# EAGLE board AliBerkErogluEagleAssignment (EAGLE 9.5.1)
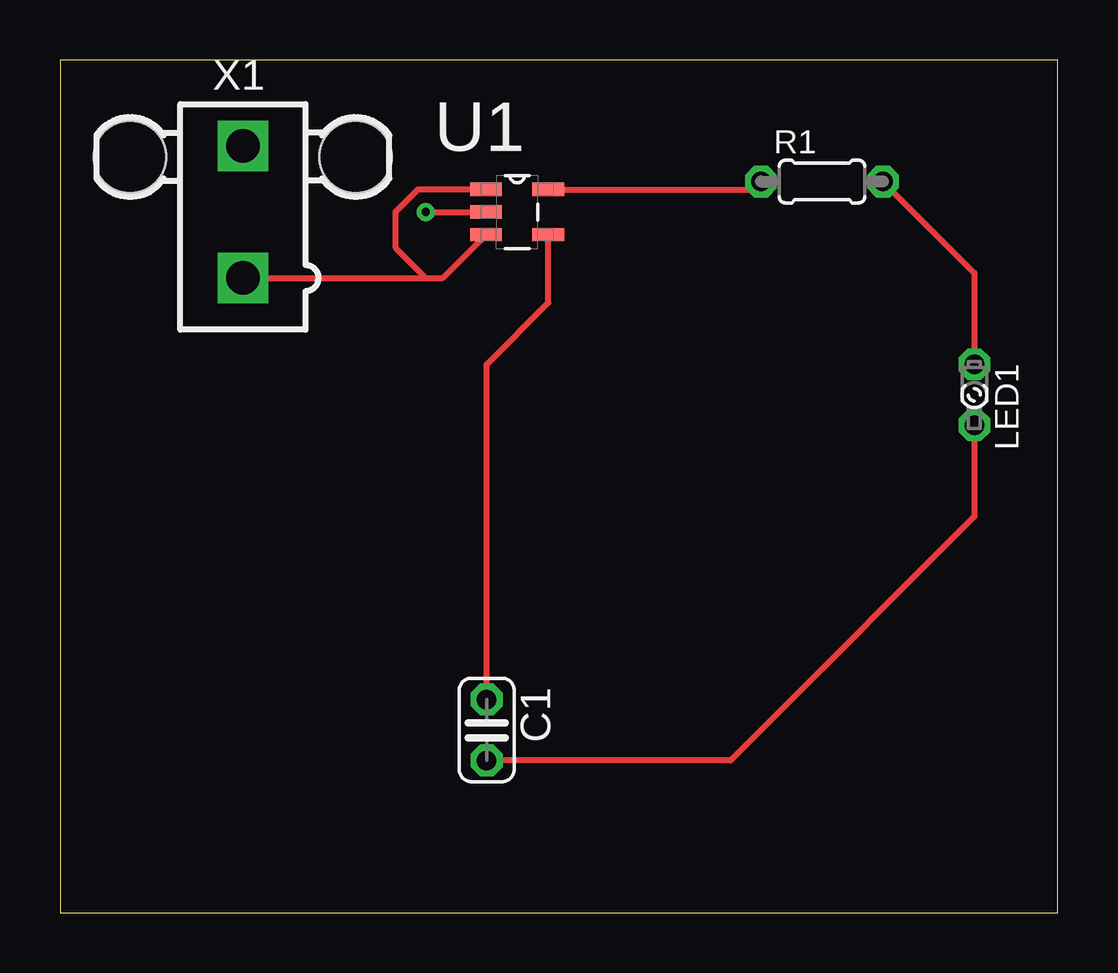
[diagram p0: board, top side]
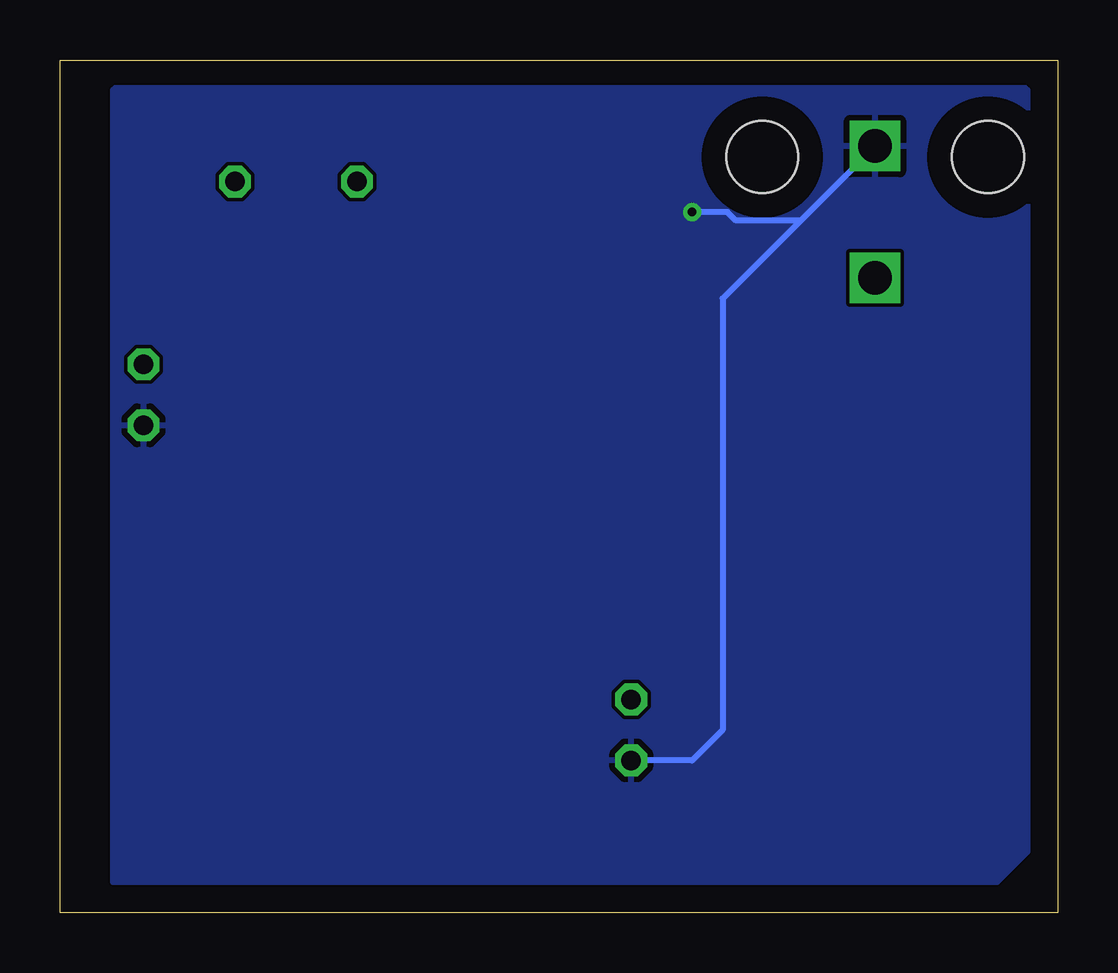
[diagram p1: board, bottom side, seen from below]

Size 41.58 x 35.55 mm. Coordinates in mm from the lower left corner, seen from the top.
Outline: 0,0 41.58,0 41.58,35.55 0,35.55 0,0
Copper layers (1*16): Top 0.035mm / dielectric 1.5mm / Bottom 0.035mm
Design rules "default": minimum track width 6mil, minimum drill 0.35mm, track to track 6mil, track to pad 6mil, pad to pad 6mil, via to via 6mil, smd to smd 6mil, copper to edge 40mil, drill to drill 6mil, minimum pad ring 10mil, minimum via ring 8mil, stop-mask expansion 4mil, vias tented up to drill 0mil, thermal gap 10mil

## Footprints (pad centres in the part's own frame; a part is rotated, then mirrored left to right if it is on the bottom)
C025-024X044 = drill 0.813 octagon: 1 -1.27,0; 2 1.27,0
LSU260 = drill 0.813 octagon: A -1.27,0; K 1.27,0
0204/5 = drill 0.813 octagon: 1 -2.54,0; 2 2.54,0
SOT95P280X110-5N = smd 1.321 x 0.559: 1 -1.295,0.94; 2 -1.295,0; 3 -1.295,-0.94; 4 1.295,-0.94; 5 1.295,0.94
5566-2 = drill 1.4 square: 1 0,-2.75; 2 0,2.75 | hole 3: 4.7,2.29; -4.7,2.29

## Placement (x,y rotation side)
C1  [C025-024X044]  17.78,7.62 270 top
LED1  [LSU260]  38.1,21.59 270 top
R1  [0204/5]  31.75,30.48 0 top
U1  TPS79915DDCTG4  [SOT95P280X110-5N]  19.05,29.21 0 top
X1  5566-2  [5566-2]  7.62,29.21 0 top

## Library data of the parts
C1 = rcl; SPICEPREFIX: C
LED1 = led
R1 = rcl; SPICEPREFIX: R
U1 = TPS79915DDCTG4; AVAILABILITY: Unavailable; DESCRIPTION: 200mA, Low Quiescent Current, Ultra-Low Noise, High PSRR Low Dropout Linear Regulator 5-SOT-23-THIN -40 to 125; MF: Texas Instruments; MP: TPS79915DDCTG4; PACKAGE: SOT-23-5 Texas Instruments; PRICE: None
X1 = con-molex; MF: MOLEX; OC_FARNELL: 1822072; OC_NEWARK: unknown

## Nets
GND: C1.2 LED1.K U1.2 X1.2
N$1: U1.1 U1.3 X1.1
N$2: R1.1 U1.5
N$3: LED1.A R1.2
N$4: C1.1 U1.4

## Tracks (layer width: path | path; a pad name or v marks a point on that pad's centre or on a via)
GND  (via drill 0.35)
  Top 0.254: LED1.K 38.1,16.51 29.21,7.62 27.94,6.35 C1.2 | v15.24,29.21 U1.2
  Bottom 0.254: C1.2 15.24,6.35 13.97,7.62 13.97,25.61 X1.2 10.72,28.86 13.42,28.86 13.77,29.21 v15.24,29.21
  pour Bottom: 2.54,35.56 1.27,34.29 1.27,2.54 2.54,1.27 39.37,1.27 39.37,34.29 38.1,35.56
N$1
  Top 0.254: U1.3 15.94,26.46 15.24,26.46 | X1.1 15.24,26.46 | U1.1 14.91,30.15 13.97,29.21 13.97,27.73 15.24,26.46
N$2
  Top 0.254: U1.5 28.88,30.15 R1.1
N$3
  Top 0.254: R1.2 38.1,26.67 LED1.A
N$4
  Top 0.254: C1.1 17.78,22.86 20.34,25.42 U1.4